# Altium PCB PinConnector.PcbDoc
Units mil, origin at the board's own origin, x right, y up, seen from the top; angles counter-clockwise.
Board outline 364 x 453 mil, 2 copper layers (Top Layer, Bottom Layer); 2 components, 5 nets, 12 pads, 0 vias.
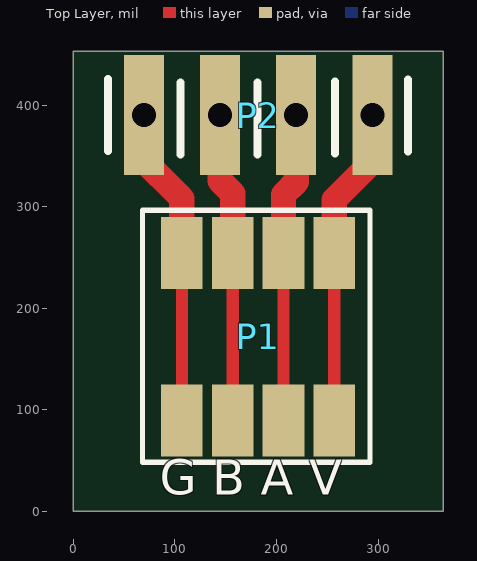
[diagram p0: Top Layer view]
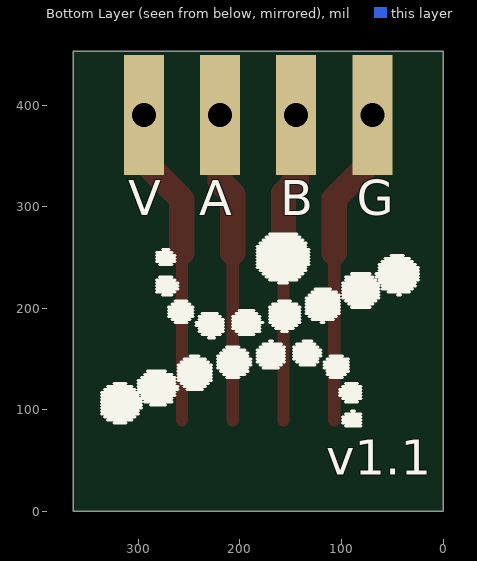
[diagram p1: Bottom Layer view, seen from below]

## Layer stack, top to bottom
Top Solder: solder mask 0.4, Solder Resist, Dk 3.5
Top Layer: signal copper 1.4
Dielectric 1: dielectric 12.6, FR-4, Dk 4.8
Bottom Layer: signal copper 1.4
Bottom Solder: solder mask 0.4, Solder Resist, Dk 3.5

## Board outline
0,0 0,453 364,453 364,0

## Design rules (kind name [scope] priority, off if disabled: settings)
Clearance [All] p1: gap=8
PolygonConnect [All] p1: connectstyle=Relief reliefconductorwidth=10 reliefentries=4 polygonreliefangle="90 Angle" airgapwidth=10
RoutingVias [All] p1: holewidth=28 width=50 viastyle="Through Hole" minholewidth=28 minwidth=50 maxholewidth=28 maxwidth=50
SolderMaskExpansion [All] p1: expansion=4
Width [All] p1: maxlimit=50 minlimit=10 preferedwidth=10
30 further rules are at their usual default settings.

## Components (designator, comment, footprint, x,y, rotation, side; value= is the part's Value field where it differs from the comment)
P1 "Conn4pin" "BOURNS 70AB/FEMALE (4 CONN)" 182,172 r90 top
P2 "Conn4pin" "CONNECTOR 4PIN 75MIL SPACE" 182,390 r0 top (schematic designator P3)

## Footprints (in the part's own frame and the unit in brackets; to place one, negate y for a bottom-side part, rotate by r counter-clockwise, add the part's x,y. Pads: shape width x height; smd on the part's side, far side on the other; paste and mask are expansions set on the pad)
"BOURNS 70AB/FEMALE (4 CONN)" [mm]
  rect 1.8x1.04 smd: 1(-2.095,1.905) 1(2.095,1.905) 2(-2.095,0.635) 2(2.095,0.635) 3(-2.095,-0.635) 3(2.095,-0.635) 4(-2.095,-1.905) 4(2.095,-1.905)
  silkscreen extent -3.14,-2.79 3.16,2.9, body extent -2.53,-2.82 2.55,2.82, height 0.81
"CONNECTOR 4PIN 75MIL SPACE" [mm]
  rect 1x3 hole 0.6: 1(-2.857,0) 2(-0.953,0) 3(0.953,0) 4(2.857,0)
  silkscreen extent -3.76,-0.98 3.75,0.9

## Nets (pads, with @x,y where several pads share a name; then routed paths per layer and width w, separated by ;. In a path a pad name is that pad's centre, name@x,y a point inside that pad or via, vN(x,y) a via of type N, cw(c..) or ccw(c..) an arc to the next point about the centre after c; other vN are vias at no path point)
A: P1.2 P2.2 | length 305.7
  Top Layer w12: P1.2@157,89.52 P1.2@157,254.48
  Top Layer w25: P2.2 144.5,325.5 157,313 P1.2@157,254.48
B: P1.3 P2.3 | length 305.7
  Top Layer w12: P1.3@207,89.52 P1.3@207,254.48
  Top Layer w25: P1.3@207,254.48 207,312 219.5,324.5 P2.3
GND: P1.4 P2.4 | length 316
  Top Layer w12: P1.4@257,89.52 P1.4@257,254.48
  Top Layer w25: P1.4@257,254.48 257,307 294.5,344.5 P2.4
NetD2_1: 
VIN: P1.1 P2.1 | length 319.7
  Top Layer w12: P1.1@107,89.52 P1.1@107,254.48
  Top Layer w25: P2.1 65,385.5 65,350 107,308 P1.1@107,254.48

## Silkscreen, mask and mechanical layers (free items; w line width, h text height)
Top Overlay:
  text "G B A V" at 85,5 h59.06
Bottom Overlay:
  drawing of 191 lines, arcs and shapes, not listed
  text "G" at 85,280 h59.06
  text "B" at 160,280 h59.06
  text "A" at 240,280 h59.06
  text "V" at 310,280 h59.06
  text "v1.1" at 115,25 h59.06
Mechanical 27:
  the board outline again, w10